# Altium PCB machin.PcbDoc
Units mm, origin at the board's own origin, x right, y up, seen from the top; angles counter-clockwise.
Board outline 110.25 x 90.25 mm, 2 copper layers (Top Layer, Bottom Layer); 14 components, 20 nets, 86 pads, 2 vias.
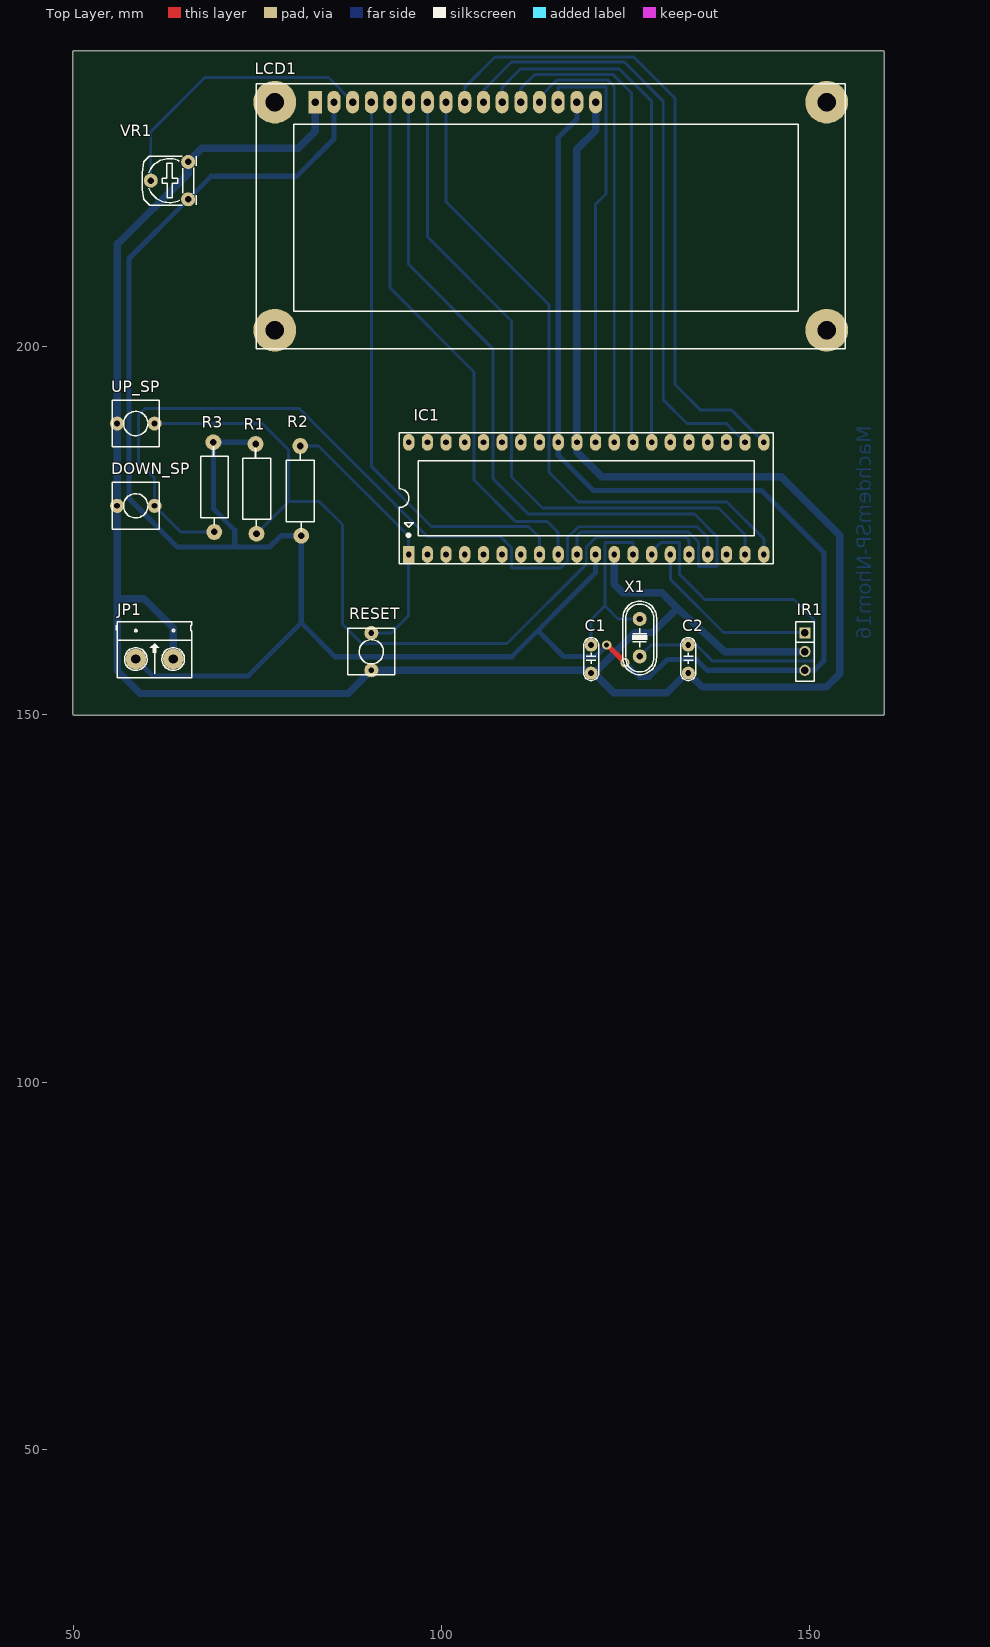
[diagram p0: Top Layer view]
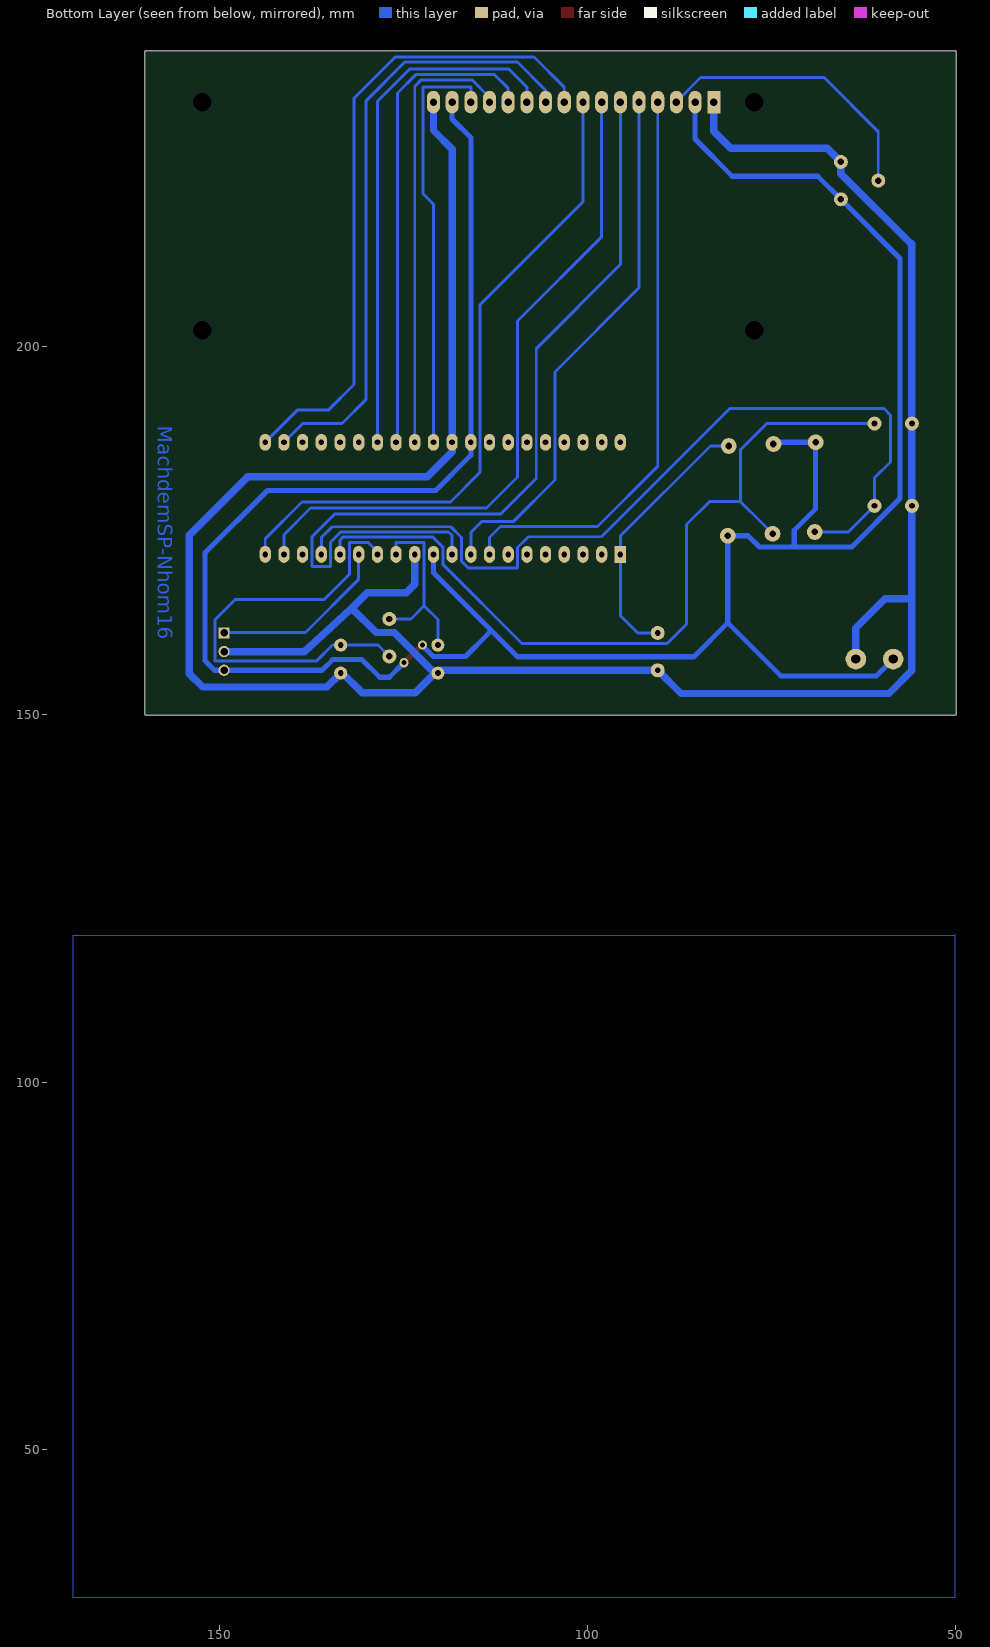
[diagram p1: Bottom Layer view, seen from below]
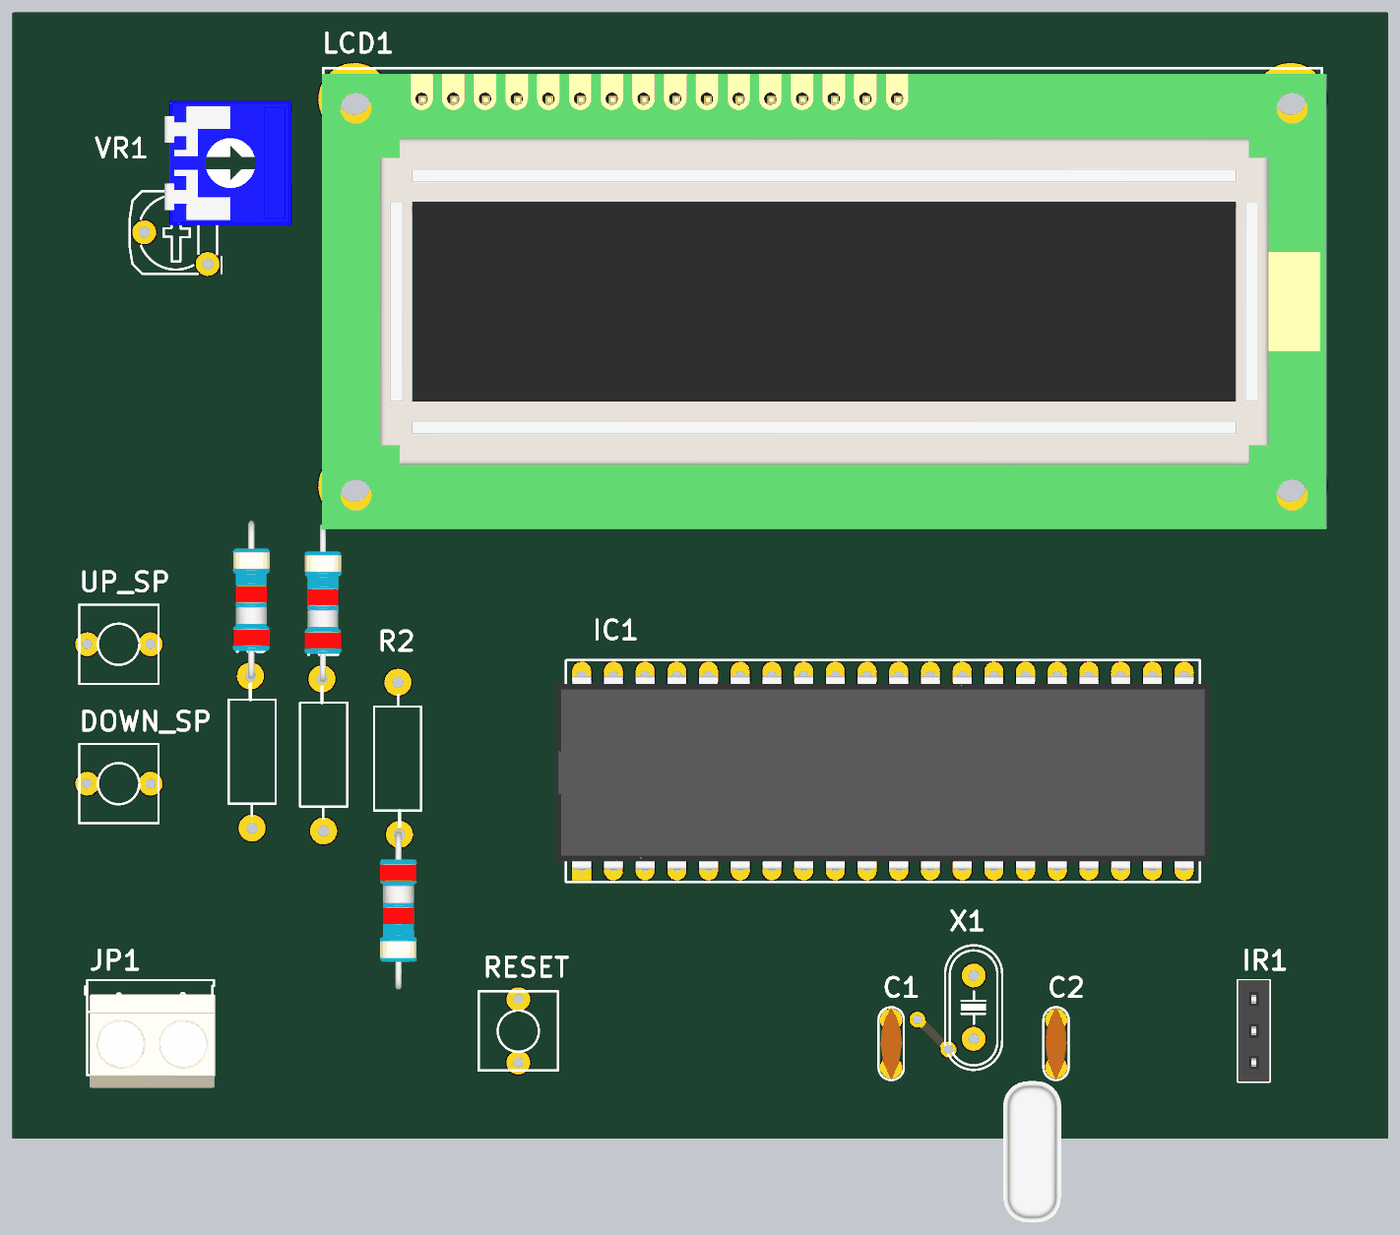
[diagram p2: 3D render of the assembled board from above, using the file's embedded part models]

## Layer stack, top to bottom
Top Layer: signal copper 0.0356
Dielectric: dielectric 0.32, FR-4, Dk 4.8
Bottom Layer: signal copper 0.0356

## Board outline
50,149.873 cw(c50,150) 49.873,150 49.873,240 cw(c50,240) 50,240.127 160,240.127 cw(c160,240) 160.127,240 160.127,150 cw(c160,150) 160,149.873

## Design rules (kind name [scope] priority, off if disabled: settings)
Clearance [All] p1: gap=0.3
PolygonConnect [All] p1: connectstyle=Relief reliefconductorwidth=0.254 reliefentries=4 polygonreliefangle="90 Angle"
RoomDefinition machnld [InComponentClass('machnld')] p1: confinementstyle=ConfineIn formatcopy=TRUE lockcomponents=FALSE outline 0,0 50.8,0 50.8,25.4 0,25.4
RoutingLayers [All] p1: top layer_v5=FALSE bottom layer_v5=TRUE
RoutingVias [All] p1: holewidth=0.711 width=1.27 viastyle="Through Hole" minholewidth=0.711 minwidth=1.27 maxholewidth=0.711 maxwidth=1.27
SilkscreenOverComponentPads [All] p1: minsilkscreentomaskgap=0.254
SolderMaskExpansion [All] p1: expansion=0.102
TestPointUsage [All] p1: valid=0 allowmultiple=FALSE
Testpoint [All] p1: side=15 testpointundercomponent=TRUE minsize=1.016 maxsize=2.54 preferedsize=1.524 minholesize=0 maxholesize=1.016 preferedholesize=0.813 testpointgrid=0.025 style=1023 order=0-112345678
Width GND [InNet('GND')] p1: maxlimit=1 minlimit=1 preferedwidth=1
Width VCC [InNet('VCC')] p2: maxlimit=0.7 minlimit=0.7 preferedwidth=0.7
Width NET [All] p3: maxlimit=0.4 minlimit=0.4 preferedwidth=0.4
22 further rules are at their usual default settings.

## Components (designator, comment, footprint, x,y, rotation, side; value= is the part's Value field where it differs from the comment)
C1 "22pF" CN1.5 120.3,159.378 r270 top
C2 "22pF" CN1.5 133.508,159.378 r270 top
DOWN_SP "SW" SW2 55.88,178.308 r0 top
IC1 "18F4520" DIP40/W0.6 95.504,171.704 r0 top
IR1 "IR" JP3-C1T 149.352,161.036 r270 top
JP1 "Header 2_1" HED2 58.42,157.48 r0 top
LCD1 "LCD16x2A" LCD16X2 82.804,233.172 r0 top
R1 "4k7" RES-1/2W 74.82,181.12 r270 top
R2 "4k7" RES-1/2W 80.772,179.832 r90 top
R3 "4k7" RES-1/2W 69.088,181.356 r270 top
RESET "SW" SW2 90.424,155.956 r90 top
UP_SP "SW" SW2 55.88,189.484 r0 top
VR1 "10K" VR 65.532,219.964 r90 top
X1 "4Mhz" XT2 126.904,160.392 r90 top

## Footprints (in the part's own frame and the unit in brackets; to place one, negate y for a bottom-side part, rotate by r counter-clockwise, add the part's x,y. Pads: shape width x height; smd on the part's side, far side on the other; paste and mask are expansions set on the pad)
CN1.5 [mil]
  round 70 hole 31: 1(0,0) 2(150,0)
  silkscreen extent -40,-40 190,40, body extent -40,-33 190,33, height 235
DIP40/W0.6 [mil] "40 PIN, W 600mil, Pin to pin 100mil"
  rect 60x90 hole 31: 1(0,0)
  oval 60x90 hole 31: 2(100,0) 3(200,0) 4(300,0) 5(400,0) 6(500,0) 7(600,0) 8(700,0) 9(800,0) 10(900,0) 11(1000,0) 12(1100,0) 13(1200,0) 14(1300,0) 15(1400,0) 16(1500,0) 17(1600,0) 18(1700,0) 19(1800,0) 20(1900,0) 21(1900,600) 22(1800,600) 23(1700,600) 24(1600,600) 25(1500,600) 26(1400,600) 27(1300,600) 28(1200,600) 29(1100,600) 30(1000,600) 31(900,600) 32(800,600) 33(700,600) 34(600,600) 35(500,600) 36(400,600) 37(300,600) 38(200,600) 39(100,600) 40(0,600)
  silkscreen extent -50,-50 1950,650, body extent -82,-10 1982,600, height 224
HED2 [mil] "Header 2, 2 pin, hight 300mil, Pin to Pin 200, Colour Green"
  round 110 hole 50: 1(0,0) 2(200,0)
  silkscreen extent -106,-100 300,200, body extent -92,-140 302,155, height 394
JP3-C1T [mm] "3 row, straight, gold plating"
  rect 1.52x1.52 hole 1.02: 1(0,0)
  round 1.52 hole 1.02: 2(2.54,0) 3(5.08,0)
  silkscreen extent -1.52,-1.27 6.6,1.27, body extent -1.52,-1.25 6.6,1.25, height 8.51
LCD16X2 [mm] "LCD dipslay 16x2, 16 pin"
  rect 1.778x3.048 hole 1: 1(0,0)
  oval 1.778x3.048 hole 1: 2(2.54,0) 3(5.08,0) 4(7.62,0) 5(10.16,0) 6(12.7,0) 7(15.24,0) 8(17.78,0) 9(20.32,0) 10(22.86,0) 11(25.4,0) 12(27.94,0) 13(30.48,0) 14(33.02,0) 15(35.56,0) 16(38.1,0)
  round 5.8 / inner round 0 / far side round 0 hole 2.5 unplated: M1(-5.5,0) M2(69.5,0) M3(-5.5,-31) M4(69.5,-31)
  silkscreen extent -8,-33.5 72,2.5, body extent -8.13,-34.47 72.37,2.03, height 18.14
RES-1/2W [mil]
  round 85 hole 35: 1(-220,-5) 2(260,0)
  silkscreen extent -195,-74 221,75, body extent -230,-60 270,56, height 121
SW2 [mil] "SW button 2pin, 250x 250 mil"
  round 75 hole 31: 1(0,0) 2(200,0)
  silkscreen extent -25,-125 225,125
VR [mil] "Resistor Variable"
  round 75 hole 35: 1(0,0) 2(100,200) 3(200,0)
  silkscreen extent -31,-44 231,246, body extent -87,-30 307,372, height 165
XT2 [mil] "Footpin for Crystal 2 pin"
  round 75 hole 34: 1(-100,0) 2(100,0)
  silkscreen extent -198,-90 195,90, body extent -233,-93 213,90, height 138

## Part data
C1 C2: library part CN1.5, "Cap np 682pF => 104pF"
DOWN_SP RESET UP_SP: library part SW2, "Switch button 2 pin"
IC1: "32KB Flash, 1536B RAM, 256B EFROM, 40-Pin PDIP"
IR1: "Receiver Infraed IC"
JP1: "Header, 2-Pin"
LCD1: library part LCD16x2, "LCD dipslay 16 char, 2 line"
R1 R2 R3: library part Res, "Res"
VR1: library part VR1, "Var Resistor"
X1: library part XT2, "Crystal For all Crystal 2pin."

## Via types
v1: diameter 1.27, hole 0.711, Top Layer to Bottom Layer, 2 vias

## Nets (pads, with @x,y where several pads share a name; then routed paths per layer and width w, separated by ;. In a path a pad name is that pad's centre, name@x,y a point inside that pad or via, vN(x,y) a via of type N, cw(c..) or ccw(c..) an arc to the next point about the centre after c; other vN are vias at no path point)
GND: C1.2 C2.2 DOWN_SP.1 IC1.12 IC1.31 IR1.2 JP1.2 LCD1.1 LCD1.16 RESET.1 UP_SP.1 VR1.3 | length 371.7
  Bottom Layer w1: 55.88,213.9 UP_SP.1 DOWN_SP.1 55.88,165.7 ; 56,213.9 65.532,223.432 VR1.3 ; JP1.2 63.5,161.7 59.5,165.7 55.88,165.7 ; VR1.3@65.532,224.332 VR1.3 ; LCD1.1 82.804,229.204 80.514,226.914 67.402,226.914 VR1.3 ; C1.2 119.912,155.956 RESET.1 87.268,152.8 59,152.8 55.88,155.92 55.88,165.7 ; LCD1.16 120.904,229.304 118.364,226.764 IC1.31 118.364,185.636 121.755,182.245 146.155,182.245 154.1,174.3 154.1,155.5 152.276,153.676 135.4,153.676 C2.2 C2.2@133.501,155.568 ; IC1.12 123.444,167.64 124.584,166.5 129.893,166.5 131.445,164.948 ; IR1.2 138.455,158.496 131.445,164.948 ; 131.445,164.948 131.996,164.396 128.687,161.087 126.238,161.087 120.719,155.568 123.387,152.9 130.6,152.9 133.268,155.568 C2.2@133.501,155.568 ; C2.2@133.501,155.568 133.494,155.575 133.501,155.575 C2.2@133.501,155.568
NetC1_1: C1.1 IC1.13 X1.2 | length 26.4
  Bottom Layer w0.4: C1.1 120.3,161.3 ; 120.3,162.1 120.3,161.3 ; 123.968,162.932 122.174,164.726 ; 124.068,162.932 X1.2 ; IC1.13 125.984,173.347 122.174,173.347 122.174,164.726 ; 120.3,161.3 120.3,162.852 122.174,164.726
NetC2_1: C2.1 IC1.14 X1.1 | length 60.7
  Bottom Layer w0.4: X1.1 128.43,159.378 C2.1 134.622,159.378 136.764,157.236 150.597,157.236 150.622,157.261 150.622,162.789 147.853,165.557 135.746,165.557 132.334,168.97 132.334,173.347 129.794,173.347 128.524,172.077 IC1.14
NetIC1_1: IC1.1 R2.2 RESET.2 | length 36.7
  Bottom Layer w0.4: R2.2 83.264,186.436 95.504,174.196 IC1.1 95.504,163.404 93.136,161.036 RESET.2
NetIC1_8: IC1.8 LCD1.4 | length 78.7
  Bottom Layer w0.4: LCD1.4 90.424,183.676 98.611,175.489 111.785,175.489 113.284,173.99 IC1.8
NetIC1_9: IC1.9 LCD1.5 | length 73.5
  Bottom Layer w0.4: LCD1.5 92.964,207.936 104.394,196.506 104.394,181.806 110,176.2 114.3,176.2 115.824,174.676 IC1.9
NetIC1_10: IC1.10 LCD1.6 | length 119.4
  Bottom Layer w0.4: LCD1.6 95.504,211.096 106.934,199.666 106.934,182.016 111.75,177.2 134.331,177.2 137.414,174.117 137.414,170.053 134.874,170.053 134.874,173.38 133.502,174.752 118.847,174.752 118.364,174.269 IC1.10
NetIC1_19: IC1.19 LCD1.7 | length 93.4
  Bottom Layer w0.4: LCD1.7 98.044,214.859 109.474,203.429 109.474,182.226 113.697,178.003 137.597,178.003 141.224,174.376 IC1.19
NetIC1_20: IC1.20 LCD1.8 | length 91.2
  Bottom Layer w0.4: LCD1.8 100.584,219.616 114.562,205.638 114.562,182.872 118.593,178.841 138.759,178.841 143.764,173.836 IC1.20
NetIC1_21: IC1.21 LCD1.9 | length 89
  Bottom Layer w0.4: LCD1.9 103.124,235.204 107.239,239.319 125,239.319 ; 125.181,239.319 125,239.319 ; IC1.21 139.408,191.3 135.2,191.3 131.7,194.8 131.7,233.7 126.081,239.319 125,239.319
NetIC1_22: IC1.22 LCD1.10 | length 83.9
  Bottom Layer w0.4: LCD1.10 105.664,234.798 109.477,238.611 124.789,238.611 130.1,233.3 130.1,192.734 133.334,189.5 138.668,189.5 IC1.22
NetIC1_27: IC1.27 LCD1.11 | length 71.5
  Bottom Layer w0.4: LCD1.11 108.204,235.204 110.642,237.642 124.168,237.642 128.524,233.286 IC1.27
NetIC1_28: IC1.28 LCD1.12 | length 66.3
  Bottom Layer w0.4: LCD1.12 110.744,235.044 112.596,236.896 123.304,236.896 125.8,234.4 125.8,187.128 IC1.28
NetIC1_29: IC1.29 LCD1.13 | length 60.5
  Bottom Layer w0.4: LCD1.13 113.284,233.807 115.673,236.196 122.555,236.196 123.444,235.307 IC1.29
NetIC1_30: IC1.30 LCD1.14 | length 57.3
  Bottom Layer w0.4: LCD1.14 115.824,235.204 122.301,235.204 122.301,220.701 120.904,219.304 IC1.30
NetLCD1_3: LCD1.3 VR1.2 | length 38.5
  Bottom Layer w0.4: VR1.2 60.452,229.152 67.8,236.5 84.616,236.5 87.884,233.232 LCD1.3
RC0: IC1.15 IR1.1 | length 24.7
  Bottom Layer w0.4: IC1.15 131.064,168.336 138.3,161.1 149.288,161.1 IR1.1
RC1: IC1.16 R1.2 UP_SP.2 | length 112.7
  Bottom Layer w0.4: UP_SP.2 75.616,189.484 79.197,185.903 79.197,178.893 ; R1.2 76.199,175.895 79.197,178.893 ; IC1.16 133.604,173.66 133.217,174.047 120.961,174.047 119.634,172.72 119.634,170.357 108.86,159.583 89.137,159.583 86.5,162.22 86.5,175.75 83.357,178.893 79.197,178.893
RC2: DOWN_SP.2 IC1.17 R3.2 | length 118.2
  Bottom Layer w0.4: R3.2 64.516,174.752 DOWN_SP.2 60.96,182.118 58.8,184.278 58.8,190.626 59.69,191.516 80.645,191.516 98.061,174.1 108,174.1 109.474,172.626 109.474,169.875 116.205,169.875 117.094,170.764 117.094,173.99 118.567,175.463 134.671,175.463 136.144,173.99 IC1.17
VCC: IC1.11 IC1.32 IR1.3 JP1.1 LCD1.2 LCD1.15 R1.1 R2.1 R3.1 VR1.1 | length 357.6
  Top Layer w0.7: v1(122.4,159.4) 122.5,159.4 v1(124.9,157)
  Bottom Layer w0.7: JP1.1 60.7,155.2 73.698,155.2 80.899,162.401 ; 74.143,172.72 72.2,172.72 ; 74.163,172.7 76.6,172.7 78.144,174.244 R2.1 80.899,162.401 ; R1.1 74.457,186.944 R3.1 68.961,177.902 71.863,175 71.863,173.057 72.2,172.72 ; LCD1.2 85.344,228.144 80.3,223.1 68.668,223.1 VR1.1 57.483,211.915 57.483,179.296 64.059,172.72 72.2,172.72 ; 113.4,160.978 116.539,157.839 120.938,157.839 122.4,159.301 v1(122.4,159.4) ; LCD1.15 118.364,230.886 115.824,228.346 IC1.32 115.824,185.176 120.6,180.4 143.475,180.4 151.943,171.933 151.943,157.236 150.663,155.956 IR1.3 136.044,155.956 134.6,157.4 130.6,157.4 128.2,155 126.9,155 v1(124.9,157) ; IC1.11 120.904,169.204 109.5,157.8 85.5,157.8 80.899,162.401
pads on no net: IC1.2 IC1.3 IC1.4 IC1.5 IC1.6 IC1.7 IC1.18 IC1.23 IC1.24 IC1.25 IC1.26 IC1.33 IC1.34 IC1.35 IC1.36 IC1.37 IC1.38 IC1.39 IC1.40 LCD1.M1 LCD1.M2 LCD1.M3 LCD1.M4

## Polygon pours and split planes (outlines as drawn)
GND on Bottom Layer "Bottom Layer-No Net" (solid, remove dead copper, shelved): 50,120 50.1,119.9 169.9,119.9 169.9,29.9 169.8,30 50,30

## Other copper
Bottom Layer:
  text "MachdemSP-Nhom16" at 158.4,189.2 h2 r90